# Altium PCB TL201蓝牙LED显示.PcbDoc
Units mm, origin at the board's own origin, x right, y up, seen from the top; angles counter-clockwise.
Board outline 58.93 x 58.93 mm, 2 copper layers (Top Layer, Bottom Layer); 17 components, 12 nets, 41 pads, 27 vias.
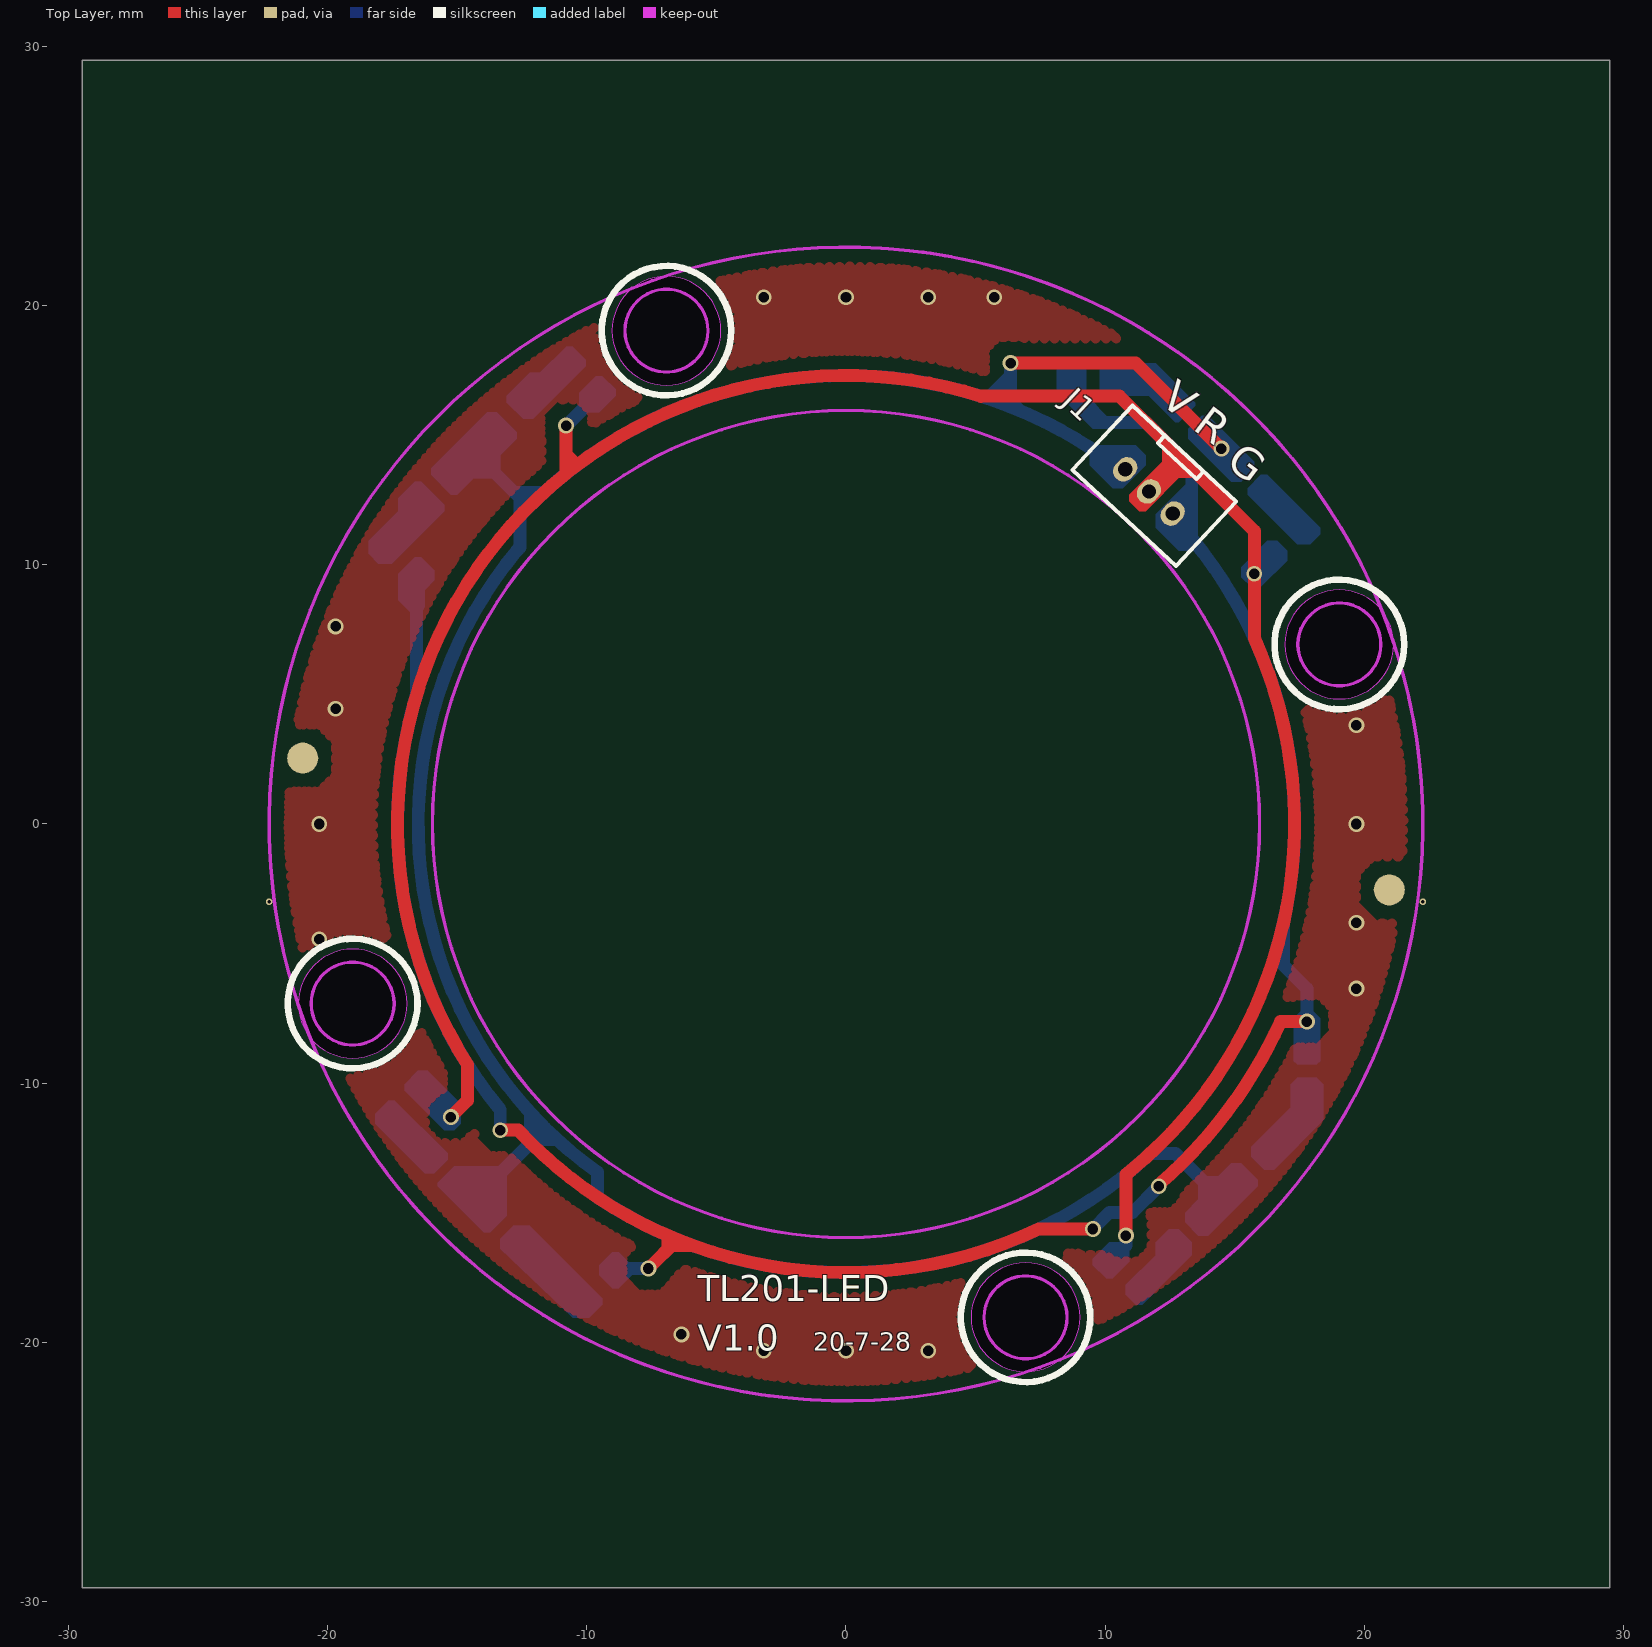
[diagram p0: Top Layer view]
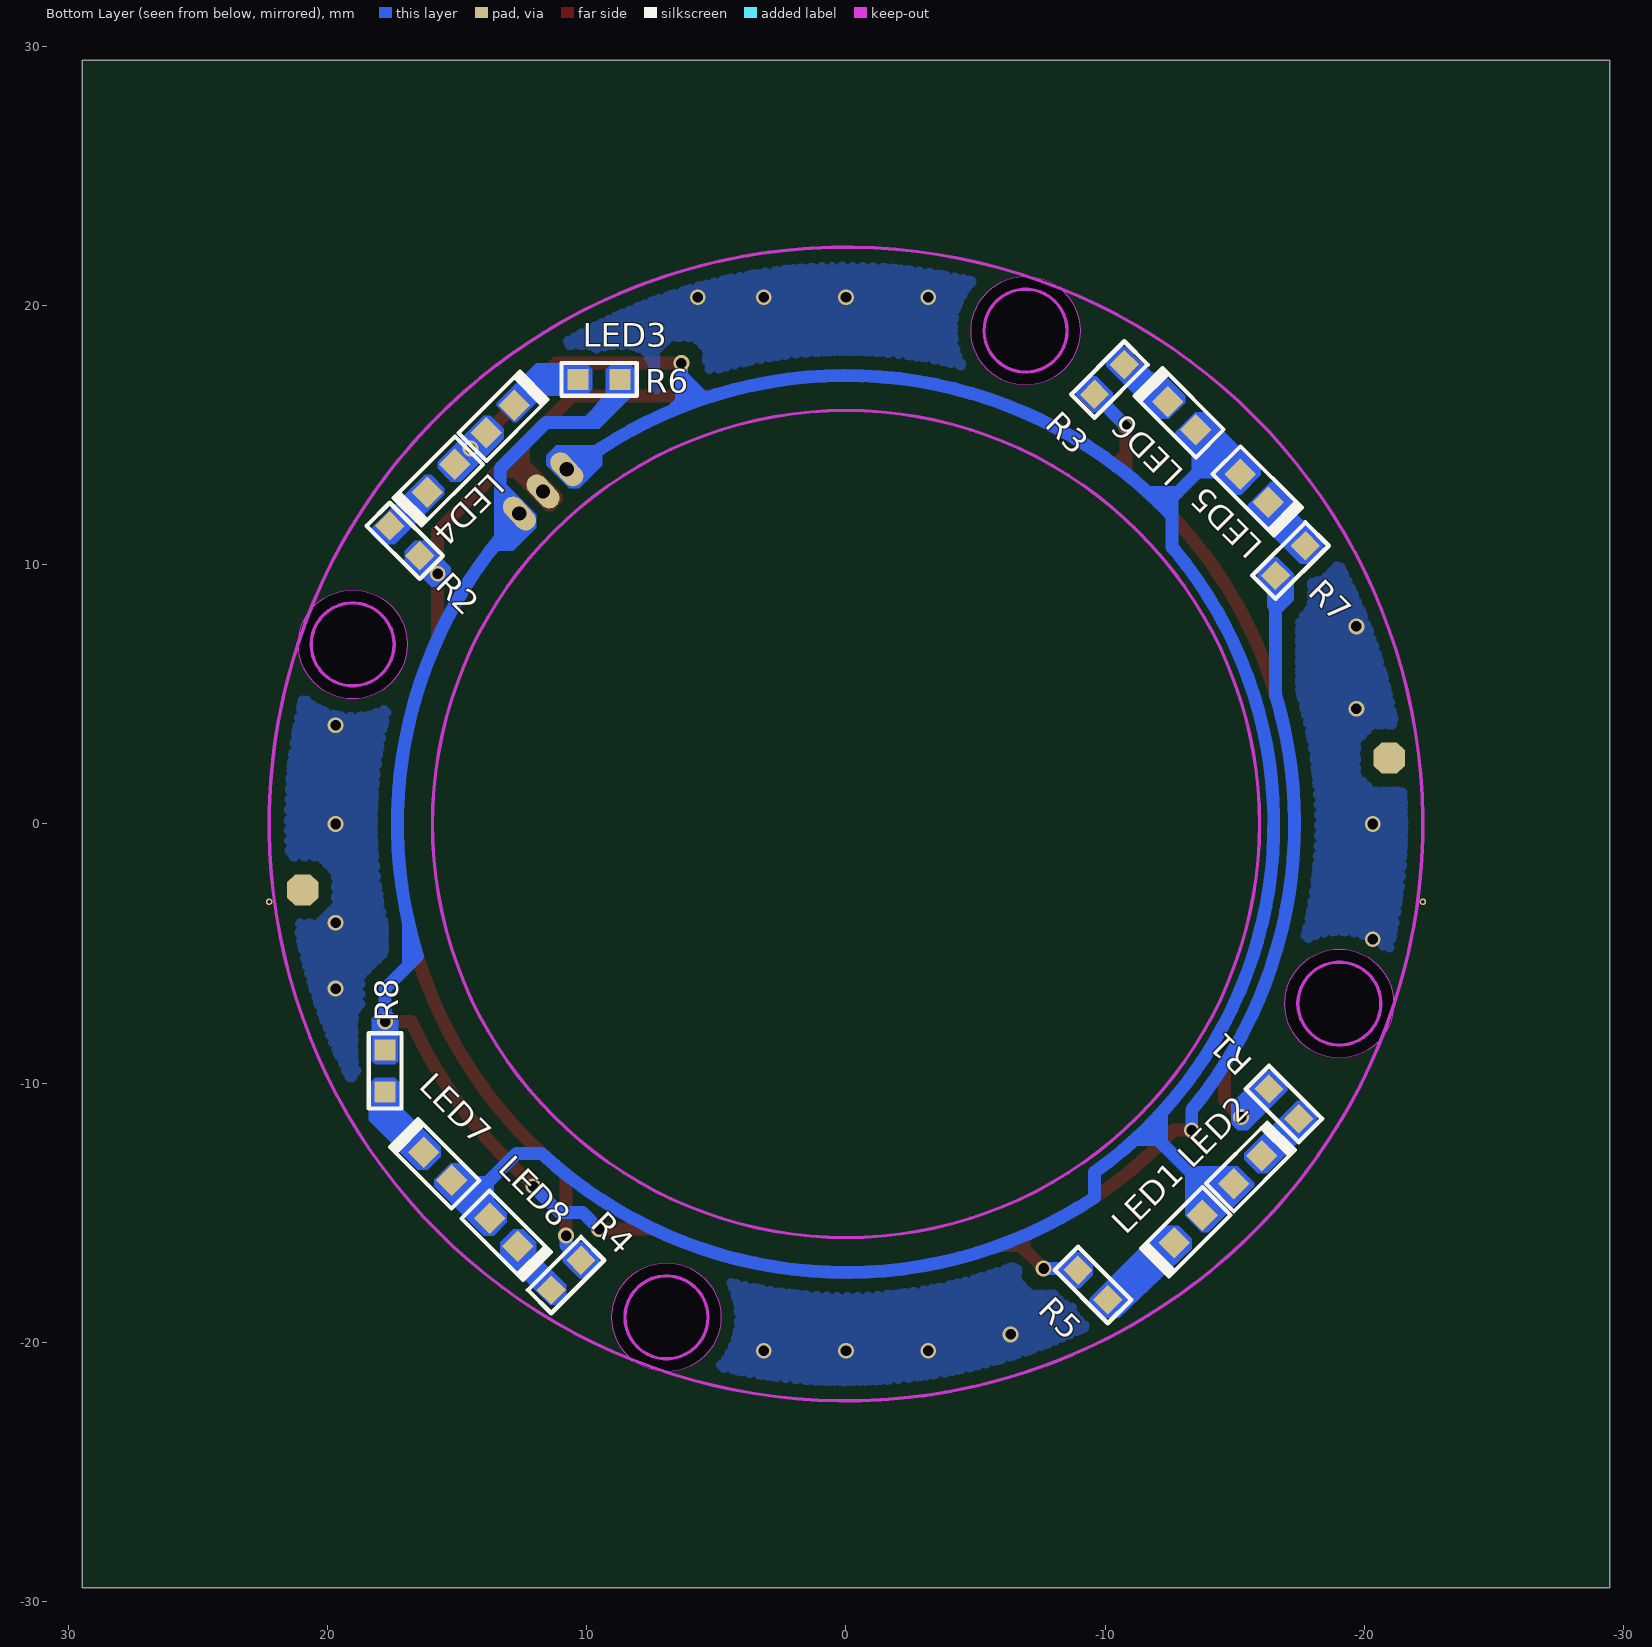
[diagram p1: Bottom Layer view, seen from below]
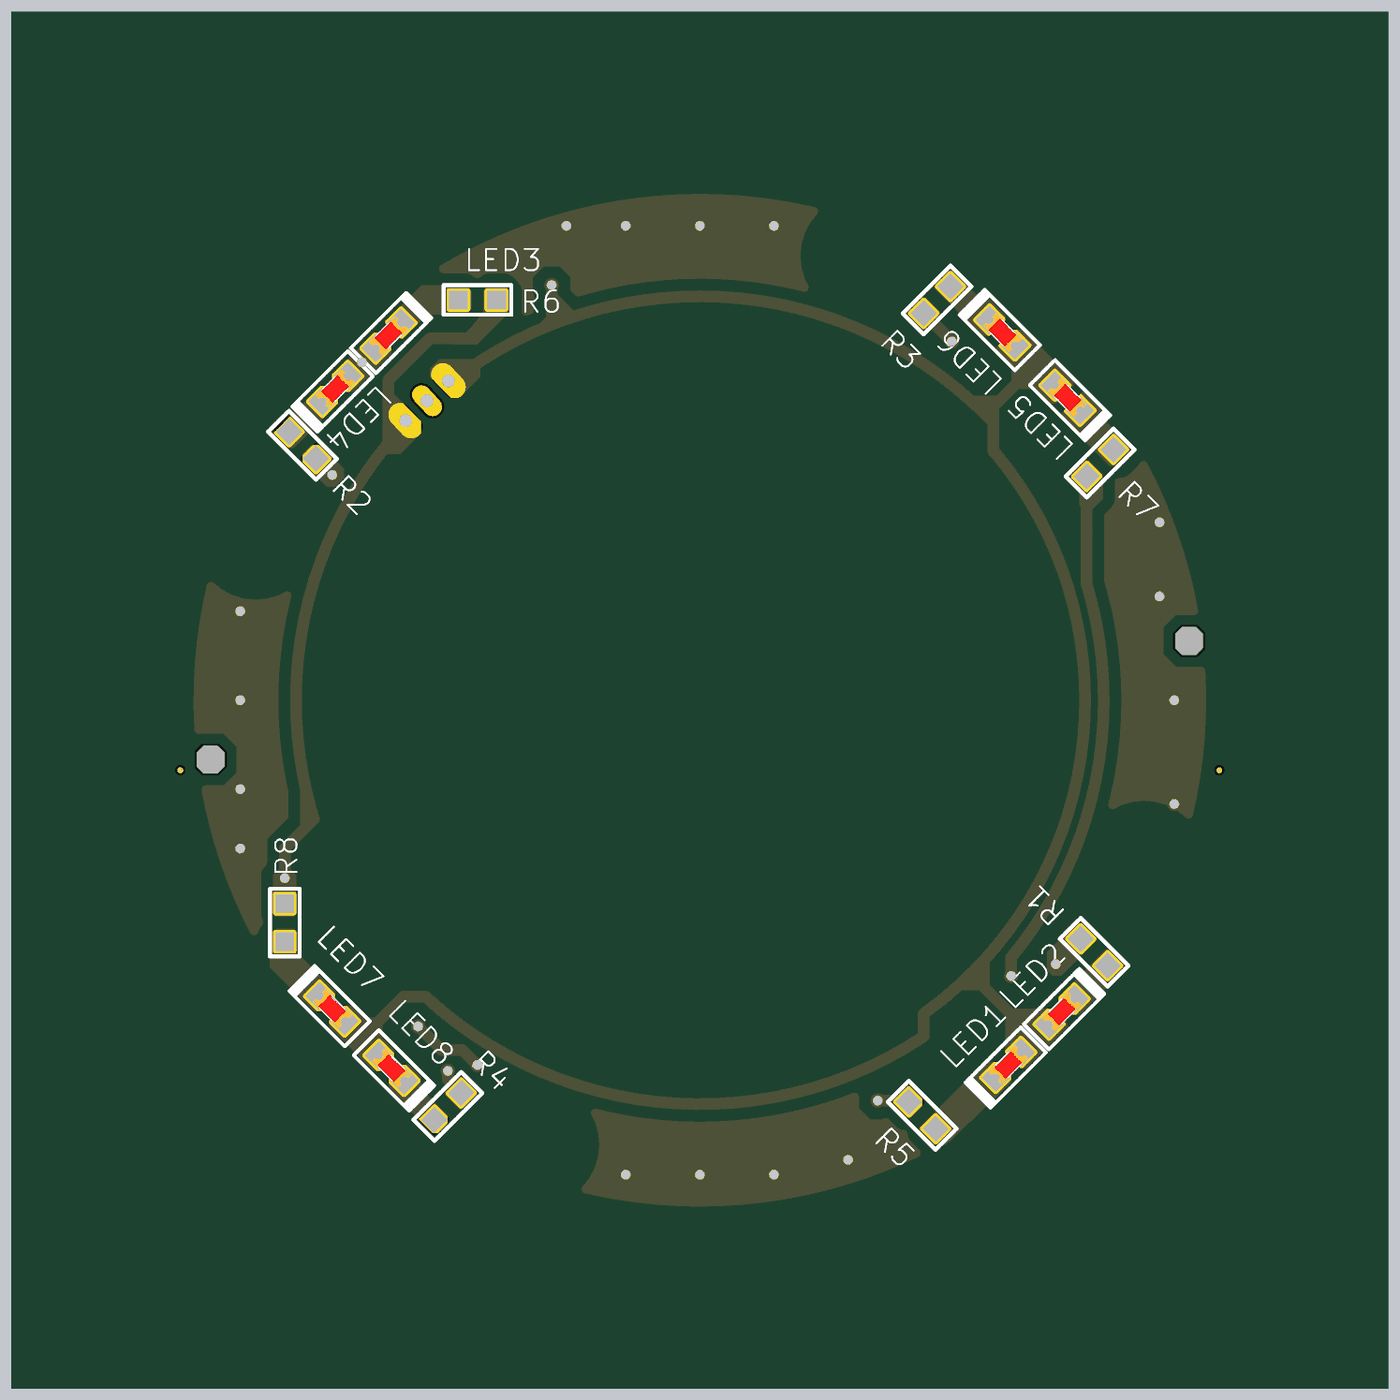
[diagram p2: 3D render of the assembled board from below, using the file's embedded part models]

## Layer stack, top to bottom
Top Layer: signal copper 0.0356
Dielectric: core 0.32, FR-4, Dk 4.8
Bottom Layer: signal copper 0.0356

## Board outline
-29.464,-29.464 29.464,-29.464 29.464,29.464 -29.464,29.464
cut-out: -21.128,-6.926 ccw(c-19.028,-6.926) -19.028,-9.026 ccw(c-19.028,-6.926) -16.928,-6.926 ccw(c-19.028,-6.926) -19.028,-4.826 ccw(c-19.028,-6.926)
cut-out: 16.928,6.926 ccw(c19.028,6.926) 19.028,4.826 ccw(c19.028,6.926) 21.128,6.926 ccw(c19.028,6.926) 19.028,9.026 ccw(c19.028,6.926)
cut-out: -6.926,21.128 ccw(c-6.926,19.028) -9.026,19.028 ccw(c-6.926,19.028) -6.926,16.928 ccw(c-6.926,19.028) -4.826,19.028 ccw(c-6.926,19.028)
cut-out: 6.926,-16.928 ccw(c6.926,-19.028) 4.826,-19.028 ccw(c6.926,-19.028) 6.926,-21.128 ccw(c6.926,-19.028) 9.026,-19.028 ccw(c6.926,-19.028)

## Design rules (kind name [scope] priority, off if disabled: settings)
Clearance Clearance_1 [(IsWire)or(IsThruPin)or(IsFill)or(InPoly)or(IsKeepOut)] p1 off: gap=0.5
Clearance [All] p2: gap=0.203
ComponentClearance [All] p1: gap=0 collisioncheckmode=3 verticalgap=0 showdistances=FALSE
HoleToHoleClearance [All] p1: gap=0 allowstackedmicrovias=TRUE
MinimumSolderMaskSliver [All] p1: minsoldermaskwidth=0
PolygonConnect PolygonConnect_1 [IsVia] p1: connectstyle=Direct reliefconductorwidth=0.254 reliefentries=4 polygonreliefangle="90 Angle" airgapwidth=0.254
PolygonConnect [All] p2: connectstyle=Relief reliefconductorwidth=0.254 reliefentries=4 polygonreliefangle="90 Angle" airgapwidth=0.254
RoutingVias [All] p1: holewidth=0.711 width=1.27 viastyle="Through Hole" minholewidth=0.3 minwidth=0.5 maxholewidth=0.711 maxwidth=1.27
SilkToSilkClearance [All] p1: silktosilkclearance=0
SilkToSolderMaskClearance SilkscreenOverComponentPads [IsPad] p1: minsilkscreentomaskgap=0 clearancetoexposedcopper=TRUE
SolderMaskExpansion [All] p1: expansion=0.102
Width [All] p1: maxlimit=2 minlimit=0.254 preferedwidth=0.254
23 further rules are at their usual default settings.

## Components (designator, comment, footprint, x,y, rotation, side; value= is the part's Value field where it differs from the comment)
J1 "3P-1.25" 3P-1.25 11.684,12.827 r137 top
LED1 "GR" 0603LED -13.208,-15.621 r315 bottom
LED2 "RR" 0603LED -15.494,-13.335 r135 bottom
LED3 "GR" 0603LED 13.335,15.621 r135 bottom
LED4 "RR" 0603LED 15.621,13.335 r315 bottom
LED5 "GR" 0603LED -15.748,12.954 r225 bottom
LED6 "RR" 0603LED -12.954,15.748 r45 bottom
LED7 "GR" 0603LED 15.748,-13.208 r45 bottom
LED8 "RR" 0603LED 13.208,-15.748 r225 bottom
R1 "1K" R0603 -16.891,-10.795 r45 bottom
R2 "1K" R0603 17.018,10.922 r225 bottom
R3 "1K" R0603 -10.16,17.145 r315 bottom
R4 "1K" R0603 10.795,-17.399 r135 bottom
R5 "1K" R0603 -9.525,-17.78 r45 bottom
R6 "1K" R0603 9.525,17.145 r180 bottom
R7 "1K" R0603 -17.145,10.16 r315 bottom
R8 "1K" R0603 17.78,-9.525 r90 bottom

## Footprints (in the part's own frame and the unit in brackets; to place one, negate y for a bottom-side part, rotate by r counter-clockwise, add the part's x,y. Pads: shape width x height; smd on the part's side, far side on the other; paste and mask are expansions set on the pad)
3P-1.25 [mm]
  oval 0.8x1 / inner oval 0.8x1 / far side oval 0.8x1.5 hole 0.55: 1(-1.25,0) 2(0,0) 3(1.25,0)
  silkscreen extent -2.73,-2 2.73,1.4
0603LED [mil]
  rect 34x34 smd: 1(-30,0) 2(30,0)
  silkscreen extent -60,-30 72,30, body extent -31,-16 31,16, height 24
R0603 [mil]
  rect 32x31.5 smd: 1(-32,0) 2(32,0)
  silkscreen extent -57,-25 57,25

## Part data
J1: library part "Header 3", "Header, 3-Pin"
LED1 LED2 LED3 LED4 LED5 LED6 LED7 LED8: library part LED
R1 R2 R3 R4 R5 R6 R7 R8: library part Res1, "Resistor"

## Free pads (board coordinates)
  round 0.254 hole 0.127: 1(-22.25,-3) 2(22.25,-3)
  round 1.2 smd: MARK(-20.955,2.54) MARK(20.955,-2.54)
  oct 1.2x1.2 smd far side: MARK(-20.955,2.54) MARK(20.955,-2.54)

## Via types
v1: diameter 0.61, hole 0.406, Top Layer to Bottom Layer, tented both sides, 27 vias

## Nets (pads, with @x,y where several pads share a name; then routed paths per layer and width w, separated by ;. In a path a pad name is that pad's centre, name@x,y a point inside that pad or via, vN(x,y) a via of type N, cw(c..) or ccw(c..) an arc to the next point about the centre after c; other vN are vias at no path point)
GREEN_LL: J1.1 R5.2 R6.2 R7.2 R8.2 | length 96.4
  Top Layer w0.5: v1(-13.335,-11.811) -12.641,-11.811 ccw(c0,0) -6.505,-16.03 ; v1(-7.62,-17.145) -6.505,-16.03 ; v1(9.525,-15.621) 7.435,-15.621 cw(c0,0) -6.505,-16.03 ; v1@12.036,-13.937 ccw(c0,0) 14.669,-11.133 ccw(c0,0) 16.037,-9.052 ; 16.521,-8.134 cw(c0,0) 16.037,-9.052 ; v1(17.78,-7.62) 16.764,-7.62 cw(c0,0) 16.037,-9.052
  Bottom Layer w0.5: R7.2@-16.653,9.503 R7.2 -16.57,4.972 ; -16.57,4.947 -16.57,4.972 ; v1(-13.335,-11.811) -13.335,-11.021 cw(c0,0) -16.57,4.972 ; R5.2 -8.89,-17.145 v1(-7.62,-17.145) ; R6.2 8.712,16.561 9.779,15.494 11.557,15.494 13.335,13.716 13.335,12.711 ; v1(9.525,-15.621) 10.159,-14.987 11.048,-14.987 v1(12.065,-13.97) ; J1.1 13.26,12.637 ; R8.2 v1(17.78,-7.62) 17.78,-6.35 16.876,-5.446 ; 13.26,12.637 13.335,12.637 ; 13.26,12.637 13.335,12.711 ; 13.335,12.637 13.335,12.711 ; 13.335,12.637 13.335,11.021 cw(c0,0) 16.876,-3.807 ; 16.876,-5.446 16.531,-5.101 ccw(c0,0) 16.876,-3.807 ; 16.876,-5.446 16.876,-3.807
MARK: 
  other v1: -3.175,-20.32 0,-20.32 3.175,-20.32 -6.35,-19.685 19.685,-6.35 -20.32,-4.445 19.685,-3.81 -20.32,0 19.685,0 19.685,3.81 -19.685,4.445 -19.685,7.62 -3.175,20.32 0,20.32 3.175,20.32 5.715,20.32
NetLED1_2: LED1.2 R5.1 | length 3.5
  Bottom Layer w0.5: LED1.2 -10.474,-18.355 R5.1
NetLED2_2: LED2.2 R1.1 | length 2
  Bottom Layer w0.5: R1.1@-17.459,-11.37 LED2.2
NetLED3_2: LED3.2 R6.1 | length 2.9
  Bottom Layer w0.5: R6.1 11.811,17.145 LED3.2
NetLED4_2: LED4.2 R2.1 | length 1.9
  Bottom Layer w0.5: LED4.2@16.129,12.765 LED4.2 R2.1@17.459,11.497
NetLED5_2: LED5.2 R7.1 | length 1.8
  Bottom Layer w0.5: R7.1 LED5.2@-16.413,12.042
NetLED6_2: LED6.2 R3.1 | length 1.8
  Bottom Layer w0.5: LED6.2@-12.042,16.413 R3.1
NetLED7_2: LED7.2 R8.1 | length 2.9
  Bottom Layer w0.5: LED7.2 17.78,-11.176 R8.1
NetLED8_2: LED8.2 R4.1 | length 2.4
  Bottom Layer w0.5: R4.1 11.37,-17.84 12.669,-16.541 LED8.2 LED8.2@12.477,-16.287
RED_LL: J1.2 R1.2 R2.2 R3.2 R4.2 | length 97.7
  Top Layer w0.5: v1(-15.24,-11.303) -14.605,-10.668 -14.605,-9.273 cw(c0,0) -10.795,13.519 cw(c0,0) -9.426,14.506 cw(c0,0) 5.21,16.497 ; 5.215,16.51 10.541,16.51 12.446,14.605 ; v1(10.795,-15.875) 10.795,-13.519 ccw(c0,0) 10.986,-13.364 ccw(c0,0) 15.748,7.162 v1(15.748,9.652) 15.748,11.303 13.462,13.589 ; J1.2 12.446,13.589 ; 12.446,13.589 12.446,14.605 ; 12.446,13.589 12.954,14.097 ; 12.446,13.589 13.462,13.589 ; 12.446,14.605 12.954,14.097 ; 12.954,14.097 13.462,13.589
  Top Layer w0.508: -10.795,13.519 v1(-10.795,15.367)
  Bottom Layer w0.5: R1.2 -15.24,-11.297 v1(-15.24,-11.303) ; R4.2 10.795,-16.25 v1(10.795,-15.875) ; v1(15.748,9.652) R2.2
  Bottom Layer w0.508: v1@-10.795,15.361 R3.2
VDD: J1.3 LED1.1 LED2.1 LED3.1 LED4.1 LED5.1 LED6.1 LED7.1 LED8.1 | length 113.9
  Top Layer w0.5: v1(6.35,17.78) 11.176,17.78 v1(14.478,14.478)
  Bottom Layer w0.5: LED5.1@-15.083,13.619 -14.351,14.351 ; LED2.1 -14.351,-14.478 ; LED1.1 -14.351,-14.478 ; LED6.1@-13.619,15.083 -14.351,14.351 ; -11.605,-11.732 -12.041,-12.168 ; v1(6.35,17.78) 6.35,16.092 ; J1.3@10.702,13.593 ccw(c0,0) 6.35,16.092 ; LED8.1 14.478,-14.478 ; LED3.1 LED4.1 ; LED7.1 14.478,-14.478 ; -14.351,-14.478 -12.163,-12.29 ; -14.351,14.351 -12.79,12.789 ; -14.351,14.351 -12.79,12.789 ; -12.79,12.789 -12.573,12.573 ; -12.79,12.789 -11.65,12.789 ; -12.79,12.789 -12.573,12.573 ; -12.706,10.527 cw(c0,0) -12.645,10.6 ; -12.706,10.527 ccw(c0,0) -12.163,-11.149 ; -12.706,10.527 -12.706,10.539 -12.645,10.6 ; -12.645,10.6 cw(c0,0) -12.573,10.685 ; -12.645,10.6 -12.573,10.672 -12.573,10.685 ; -12.573,10.685 -12.573,12.573 ; -12.573,12.573 -12.485,12.485 -12.485,11.975 cw(c0,0) -11.65,12.789 ; -12.163,-12.29 -12.163,-11.149 ; -12.163,-12.29 -12.041,-12.168 ; -12.163,-11.149 ccw(c0,0) -11.144,-12.168 ; -12.041,-12.168 -11.144,-12.168 ; -11.65,12.789 cw(c0,0) 6.35,16.092 ; -11.144,-12.168 ccw(c0,0) -9.59,-13.427 -9.59,-14.398 ccw(c0,0) 11.747,-12.7 12.7,-12.7 14.478,-14.478

## Polygon pours and split planes (outlines as drawn)
MARK on Bottom Layer "Top Layer-No Net" (hatched 45Degree grid 0.279 track 0.381, remove dead copper, pour order 4): -22.225,24.13 23.495,24.13 23.495,-24.13 -24.13,-24.13 -24.13,24.13
MARK on Top Layer "Top Layer-No Net" (hatched 45Degree grid 0.279 track 0.381, remove dead copper, pour order 3): -22.225,24.13 23.495,24.13 23.495,-24.13 -24.13,-24.13 -24.13,24.13

## Keep-outs
Keep-Out Layer:
  circle w0.127: c-19.028,-6.926 r1.6
  circle w0.127: c19.028,6.926 r1.6
  circle w0.127: c6.926,-19.028 r1.6
  circle w0.127: c-6.926,19.028 r1.6
  lines w0.127: -22.25,0 ccw(c0,0) 0,22.25 ; 0,-22.25 cw(c0,0) 22.25,0 ; 0,-15.95 ccw(c0,0) 0,15.95 ccw(c0,0) 0,-15.95

## Other copper
Top Layer:
  region net RED_LL: -10.223,14.034 -10.604,14.415 -10.927,14.092 -10.546,13.711
  region net GREEN_LL: -6.858,-16.51 -6.858,-15.875 -7.112,-15.875 -7.112,-16.51
  region net GREEN_LL: -5.842,-16.51 -5.842,-16.129 -6.858,-16.129 -6.858,-16.51
  region net RED_LL: 10.922,12.7 12.319,14.097 12.7,14.097 12.954,13.462 11.557,12.065 11.303,12.065 10.922,12.446
Bottom Layer:
  region net VDD: 6.985,16.002 6.716,16.271 6.462,16.017 6.731,15.748
  region net VDD: 6.731,16.256 6.033,16.955 5.652,16.574 6.35,15.875
  region net VDD: 6.477,17.145 6.16,17.463 5.334,16.637 5.652,16.32
  rectangle net VDD: -12.827,11.811 -12.573,12.827
  region net GREEN_LL: 11.938,11.938 13.081,13.081 13.462,13.081 13.462,10.541 12.827,10.541 11.938,11.43
  region net GREEN_LL: -9.017,-16.51 -8.763,-16.51 -8.255,-17.018 -8.128,-17.272 -8.763,-17.907 -9.017,-17.907 -9.525,-17.399 -9.525,-17.018
  region net RED_LL: 10.033,-17.526 10.287,-17.526 10.922,-16.891 10.922,-16.383 10.668,-16.129 10.16,-16.129 9.525,-16.764 9.525,-17.018
  region net VDD: 13.589,-15.875 13.081,-15.367 13.081,-14.986 13.589,-14.478 13.589,-13.843 13.843,-13.589 14.351,-13.589 14.859,-13.081 15.24,-13.081 15.875,-13.716 15.875,-13.97 13.97,-15.875
  region net NetLED8_2: 13.335,-16.129 12.827,-15.621 12.446,-15.621 11.938,-16.129 11.938,-16.637 10.795,-17.78 10.795,-18.161 11.176,-18.542 11.43,-18.542 13.335,-16.637
  region net NetLED7_2: 18.415,-10.033 18.161,-9.779 17.399,-9.779 17.145,-10.033 17.145,-10.922 15.621,-12.446 15.621,-12.827 16.129,-13.335 16.51,-13.335 18.415,-11.43
  region net GREEN_LL: 18.161,-9.271 18.288,-9.144 18.288,-7.493 18.034,-7.239 17.526,-7.239 17.272,-7.493 17.272,-9.144 17.399,-9.271
  region net RED_LL: -8.89,16.51 -8.89,16.764 -9.398,17.272 -9.652,17.272 -10.287,16.637 -10.287,16.129 -10.033,15.875 -9.525,15.875
  region net NetLED6_2: -12.065,15.621 -10.033,17.653 -10.033,17.907 -10.541,18.415 -10.795,18.415 -11.811,17.399 -12.192,17.399 -13.081,16.51 -13.081,16.256 -12.446,15.621
  region net VDD: -13.462,15.875 -13.843,15.875 -16.002,13.716 -16.002,13.462 -15.24,12.7 -14.986,12.7 -14.351,13.335 -13.589,13.335 -13.335,13.589 -13.335,14.224 -12.7,14.859 -12.7,15.113
  region net GREEN_LL: -16.637,10.287 -17.272,9.652 -17.272,8.636 -16.764,8.128 -16.383,8.128 -16.256,8.382 -16.256,9.017 -15.875,9.398 -15.875,9.779 -16.383,10.287
  region net NetLED5_2: -16.383,13.208 -16.637,13.208 -17.272,12.573 -17.272,12.065 -18.415,10.922 -18.415,10.414 -18.034,10.033 -17.526,10.033 -15.494,12.065 -15.494,12.319
  region net NetLED1_2: -9.398,-18.542 -9.398,-18.288 -12.192,-15.494 -12.827,-15.494 -13.335,-16.002 -13.335,-16.383 -10.541,-19.05 -9.906,-19.05
  region net VDD: -13.081,-15.113 -13.716,-15.748 -13.97,-15.748 -15.748,-13.97 -15.748,-13.843 -15.113,-13.208 -13.081,-13.208
  region net NetLED2_2: -15.367,-12.954 -15.875,-13.462 -16.256,-13.462 -18.161,-11.557 -18.161,-11.176 -17.653,-10.668 -17.399,-10.668 -15.367,-12.7
  region net RED_LL: -17.018,-10.287 -17.018,-10.033 -16.51,-9.525 -16.129,-9.525 -14.859,-10.795 -14.859,-11.557 -15.113,-11.811 -15.494,-11.811
  region net RED_LL: 17.018,10.16 17.018,10.541 16.637,10.922 16.256,10.922 15.24,9.906 15.24,9.525 15.621,9.144 16.002,9.144
  region net NetLED4_2: 18.288,11.176 18.288,11.43 16.256,13.462 16.002,13.462 15.494,12.954 15.494,12.7 17.399,10.795 17.907,10.795
  region net VDD: 15.748,13.716 15.748,13.97 13.97,15.748 13.716,15.748 13.208,15.24 13.208,14.859 14.859,13.208 15.24,13.208
  region net NetLED3_2: 13.462,16.129 13.462,16.256 11.938,17.78 10.033,17.78 9.779,17.526 9.779,16.764 10.033,16.51 11.684,16.51 12.7,15.494 12.827,15.494
  region net GREEN_LL: 9.271,16.637 9.271,17.526 9.017,17.78 8.382,17.78 8.128,17.526 8.128,16.637 9.525,15.24 10.541,15.24 9.779,16.002
  region net VDD: 10.668,12.954 11.557,13.843 11.557,14.224 11.176,14.605 9.525,14.605 9.398,14.478 9.398,13.843 10.287,12.954

## Silkscreen, mask and mechanical layers (free items; w line width, h text height)
Top Overlay:
  circle w0.254: c19.028,6.926 r2.5
  circle w0.254: c-19.028,-6.926 r2.5
  circle w0.254: c-6.926,19.028 r2.5
  circle w0.254: c6.926,-19.028 r2.5
  text "V" at 12.065,16.256 h1.2 r323
  text "R" at 13.335,15.24 h1.2 r323
  text "G" at 14.605,13.843 h1.2 r323
  text "TL201-LED" at -5.715,-18.415 h1
  text "V1.0" at -5.715,-20.32 h1
  text "20-7-28" at -1.27,-20.32 h0.7
Mechanical 13:
  lines w0.254: -15.95,-0.254 -15.95,0.254 ; -14.426,-0.508 -15.95,0 ; -14.426,0.508 -15.95,0 ; -6.373,0 -15.95,0 ; 6.373,0 15.95,0 ; 14.426,-0.508 15.95,0 ; 14.426,0.508 15.95,0 ; 15.95,-0.254 15.95,0.254
  text "31.9 (mm)" at -6.119,-0.914 h1.52

## Dimensions
22.25,-3 to -22.25,-3 on Keep-Out Layer